# Altium PCB meltdown_protection.PcbDoc
Units mm, origin at the board's own origin, x right, y up, seen from the top; angles counter-clockwise.
Board outline 40.51 x 23.37 mm, 4 copper layers (Top Layer, PWR, GND, Bottom Layer), stack 0.603 mm thick; 49 components, 34 nets, 137 pads, 59 vias.
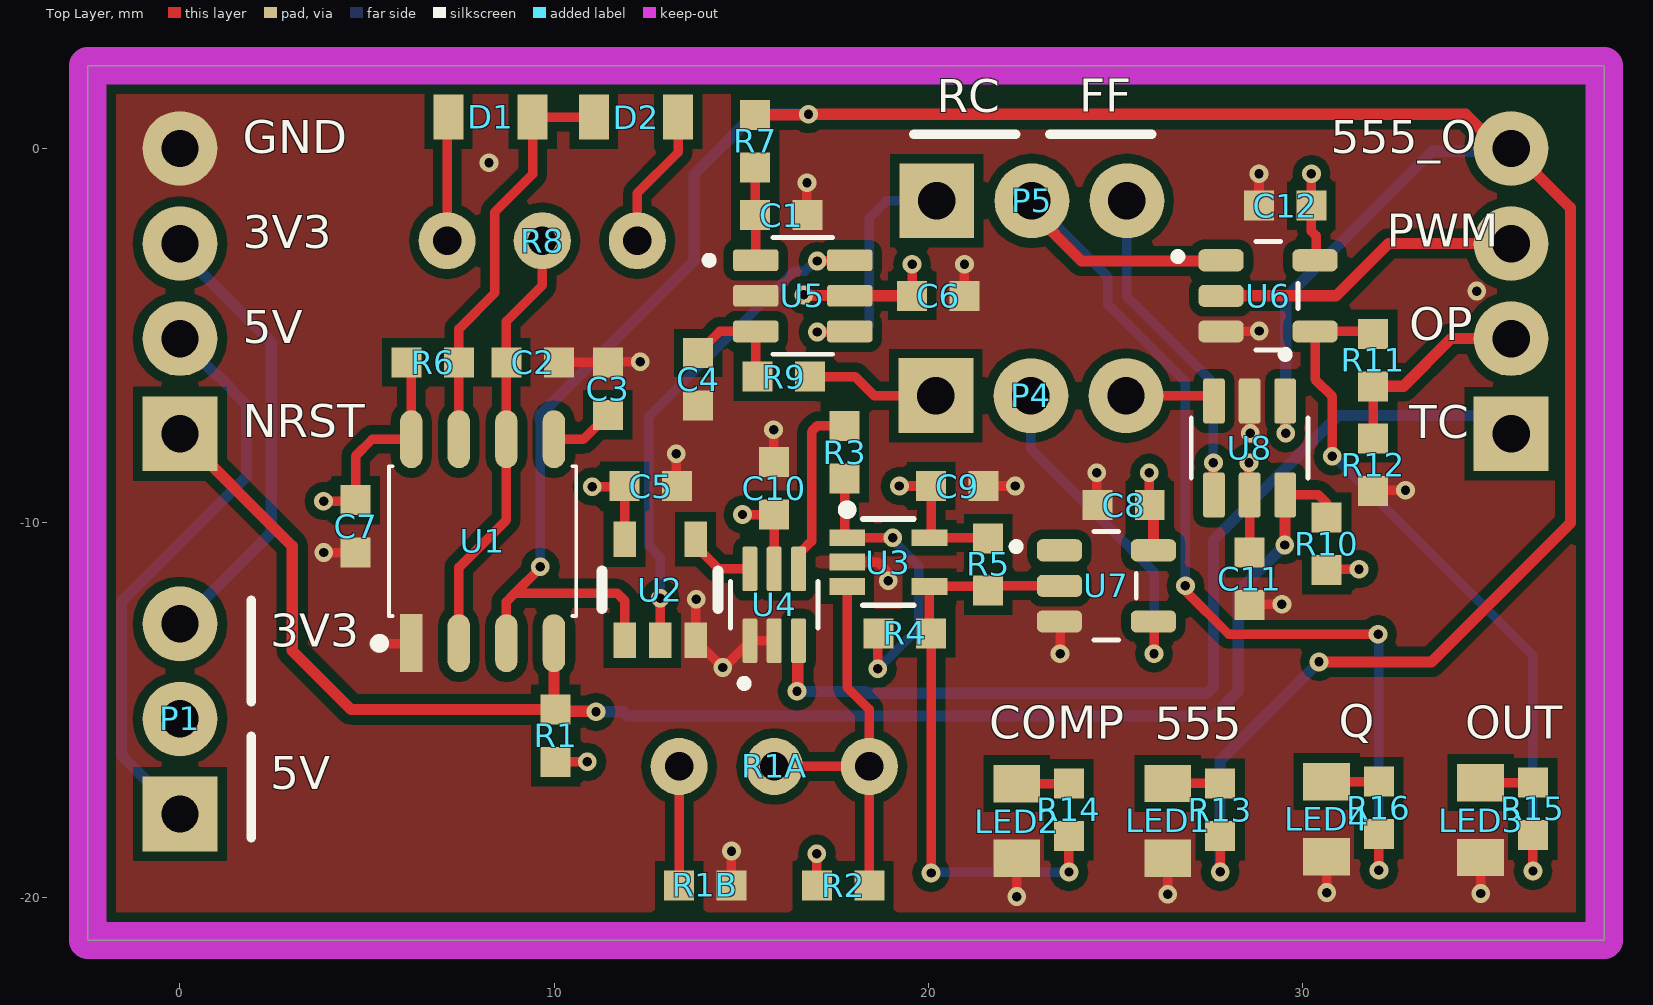
[diagram p0: Top Layer view]
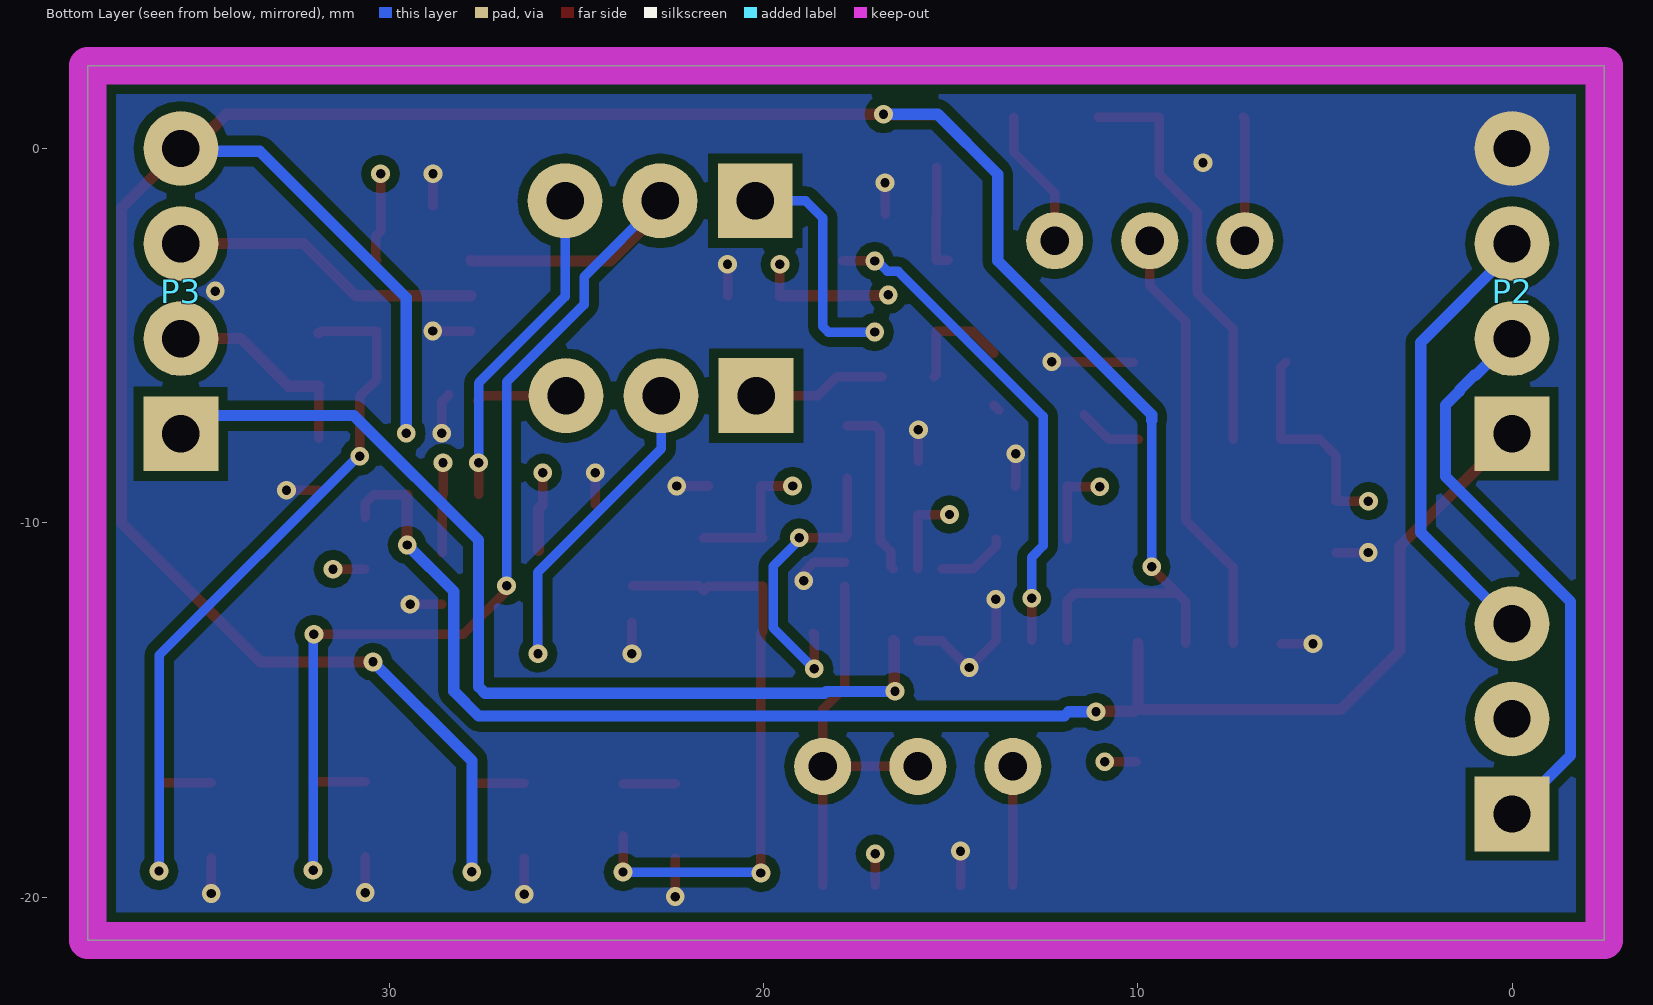
[diagram p1: Bottom Layer view, seen from below]
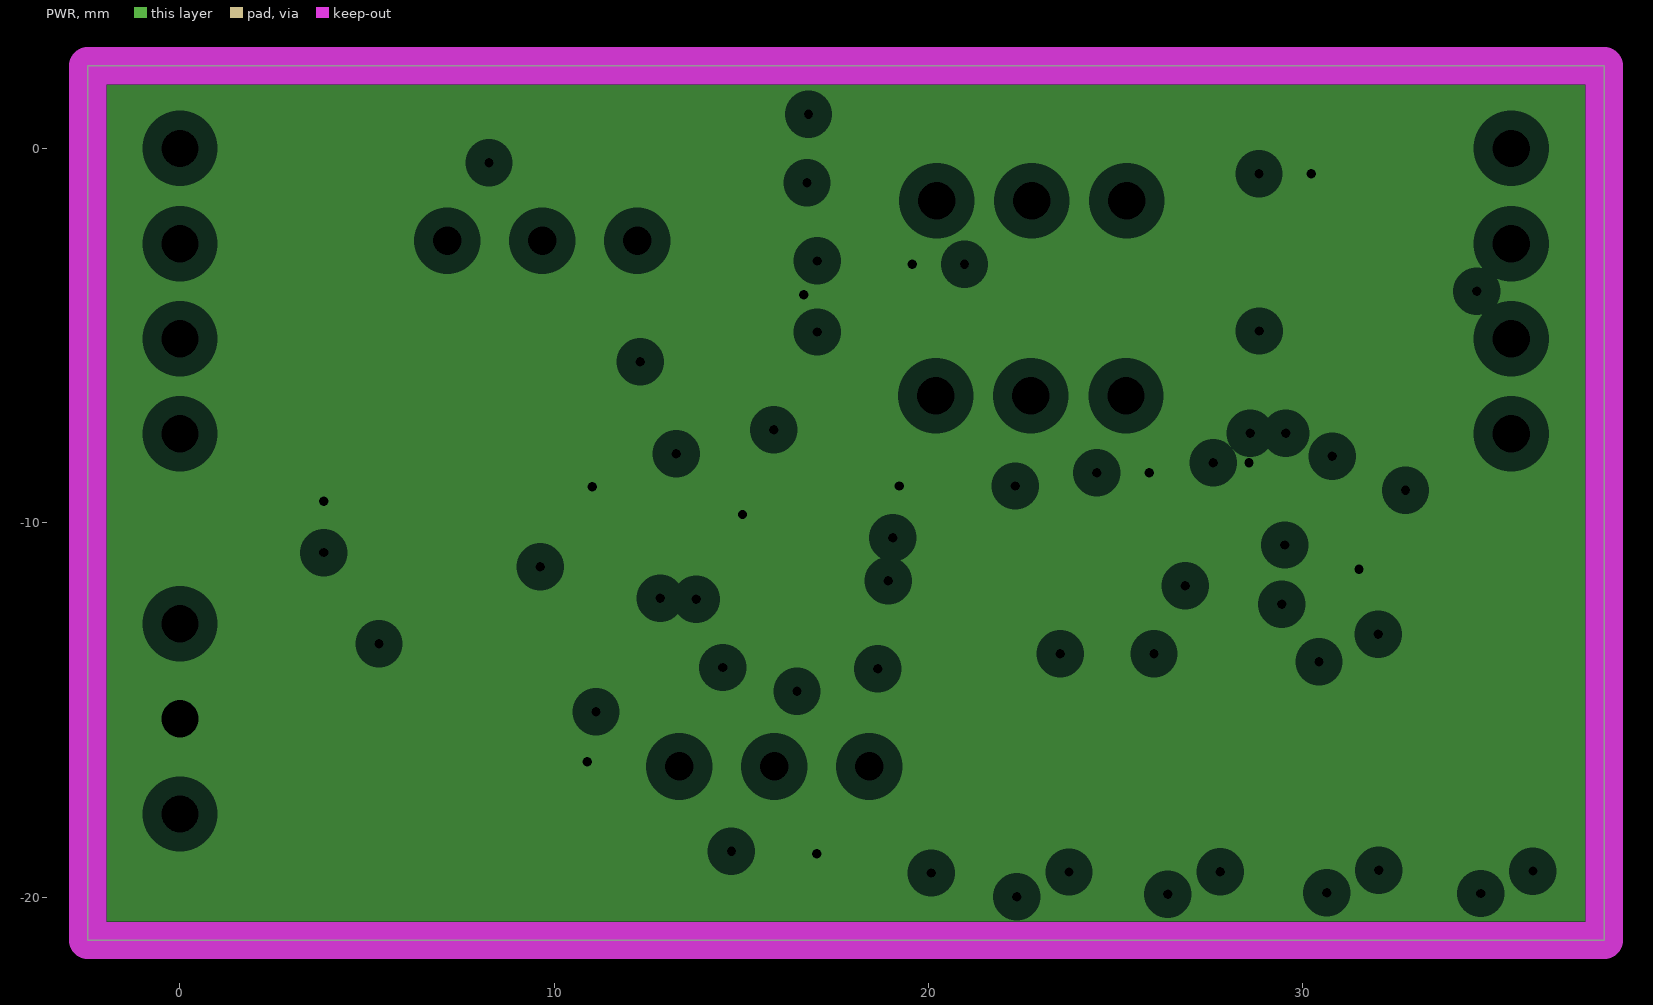
[diagram p2: PWR, clearances drawn from the general rule]
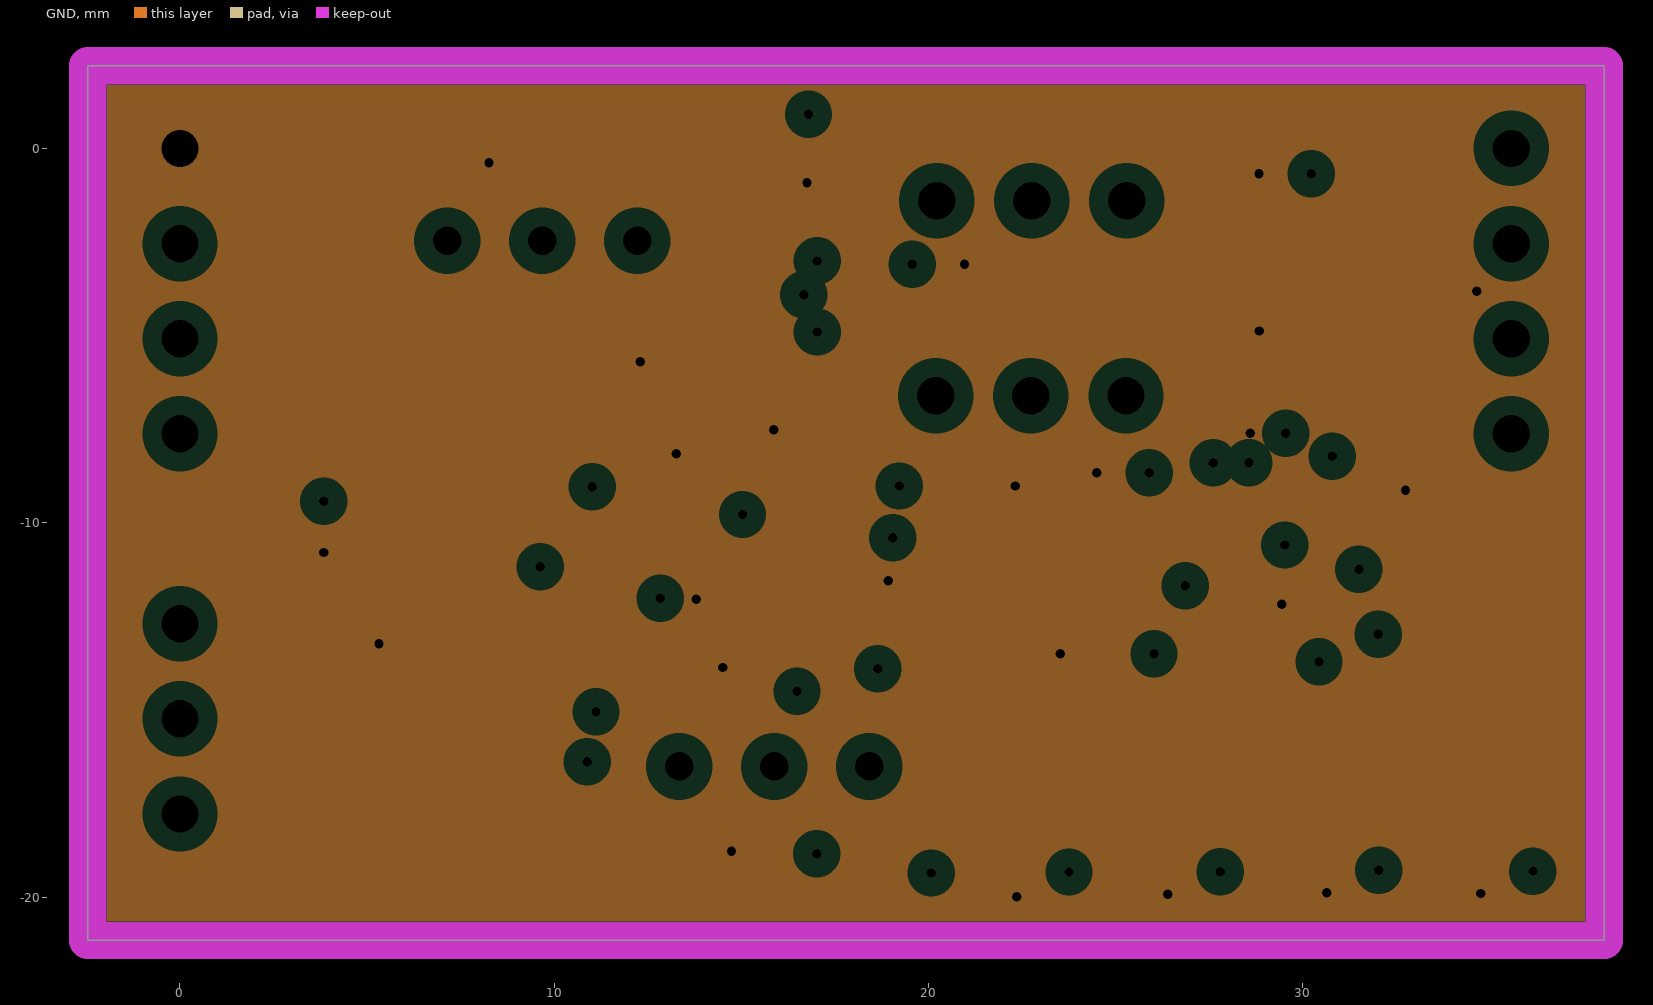
[diagram p3: GND, clearances drawn from the general rule]

## Layer stack, top to bottom
Top Solder: solder mask 0.0102, Solder Resist, Dk 3.5
Top Layer: signal copper 0.0356
Dielectric 2: prepreg 0.0711, PP-006, Dk 4.1
PWR: plane copper 0.035, net VCC
Dielectric 1: dielectric 0.32, FR-4, Dk 4.8
GND: plane copper 0.035, net GND
Dielectric 3: prepreg 0.0711, PP-006, Dk 4.1
Bottom Layer: signal copper 0.0356
Bottom Solder: solder mask 0.0102, Solder Resist, Dk 3.5

## Board outline
-2.464,-21.158 -2.464,2.21 38.049,2.21 38.049,-21.158

## Design rules (kind name [scope] priority, off if disabled: settings)
Clearance Clearance_1 [InComponent('U3') or InComponent('U4')] p1: gap=0.254 ignorepadtopadclearanceinfootprint=FALSE except(0: Arc-Hole Track-Hole SMDPad-Hole THPad-Hole Via-Hole Fill-Hole Poly-Hole Region-Hole Text-Hole; 0.2: SMDPad-SMDPad)
Clearance [All] p2: gap=0.254 ignorepadtopadclearanceinfootprint=FALSE except(0: Arc-Hole Track-Hole SMDPad-Hole THPad-Hole Via-Hole Fill-Hole Poly-Hole Region-Hole Text-Hole)
MinimumSolderMaskSliver [All] p1: minsoldermaskwidth=0.1
PlaneClearance [All] p1: clearance=0.508
PlaneConnect [All] p1: planeconnectstyle=Direct reliefexpansion=0.508 reliefentries=4 reliefconductorwidth=0.254 reliefairgap=0.254
PolygonConnect [All] p1: connectstyle=Direct reliefconductorwidth=0.254 reliefentries=4 polygonreliefangle="90 Angle" airgapwidth=0.254
RoutingVias [All] p1: holewidth=0.25 width=0.5 viastyle="Through Hole" minholewidth=0.25 minwidth=0.5 maxholewidth=0.25 maxwidth=0.5
SilkToSilkClearance [All] p1: silktosilkclearance=0.1
SilkToSolderMaskClearance [IsPad] p1: minsilkscreentomaskgap=0.1 clearancetoexposedcopper=TRUE
SolderMaskExpansion [All] p1: expansion=0.102 istentingtop=FALSE
Width [All] p1: maxlimit=0.6 minlimit=0.2 preferedwidth=0.254
25 further rules are at their usual default settings.

## Components (designator, comment, footprint, x,y, rotation, side; value= is the part's Value field where it differs from the comment)
C1 "0603, capacitor" "0603 cap" 16.067,-1.78 r0 top value=0
C2 "0603, capacitor" "0603 cap" 9.42,-5.717 r0 top value=0
C3 "0603, capacitor" "0603 cap" 11.432,-6.415 r90 top value=0
C4 "0603, capacitor" "0603 cap" 13.841,-6.164 r270 top value=0
C5 "0603, capacitor" "0603 cap" 12.576,-9.019 r0 top value=0
C6 "0603, capacitor" "0603 cap" 20.258,-3.939 r0 top value=0
C7 "0603, capacitor" "0603 cap" 4.688,-10.095 r270 top value=0
C8 "0603, capacitor" "0603 cap" 25.208,-9.523 r180 top value=0
C9 "0603, capacitor" "0603 cap" 20.766,-9.019 r0 top value=0
C10 "0603, capacitor" "0603 cap" 15.877,-9.079 r90 top value=0
C11 "0603, capacitor" "0603 cap" 28.573,-11.495 r270 top value=0
C12 "0603, capacitor" "0603 cap" 29.526,-1.522 r180 top value=0
D1 "Diode, SMD" SOD323 8.298,0.787 r180 top
D2 "Diode, SMD" SOD323 12.185,0.787 r180 top
LED1 "0805, LED" 0805_led 26.415,-17.964 r90 top value="0805 LED"
LED2 "0805, LED" 0805_led 22.377,-17.967 r90 top value="0805 LED"
LED3 "0805, LED" 0805_led 34.772,-17.942 r90 top value="0805 LED"
LED4 "0805, LED" 0805_led 30.657,-17.916 r90 top value="0805 LED"
P1 "1x3 Pin Header Mux" padThree_L 0,-15.24 r90 top value="1x3 Pin Header"
P2 "4x1 Pin Header" padFour_L 0,-3.79 r90 bottom
P3 "4x1 Pin Header" padFour_L 35.56,-3.79 r90 bottom
P4 "1x3 Pin Header Mux" padThree_L 22.733,-6.604 r0 top value="1x3 Pin Header"
P5 "1x3 Pin Header Mux" padThree_L 22.758,-1.397 r0 top value="1x3 Pin Header"
R1 "0603, resistor" 0603 10.033,-15.686 r270 top value=0
R1A "Pot" PV36W104C01B00 15.875,-16.51 r0 top value=0
R1B "0603, resistor" 0603 14.035,-19.685 r180 top value=0
R2 "0603, resistor" 0603 17.715,-19.685 r180 top value=0
R3 "0603, resistor" 0603 17.755,-8.114 r90 top value=0
R4 "0603, resistor" 0603 19.366,-12.954 r180 top value=0
R5 "0603, resistor" 0603 21.59,-11.114 r270 top value=0
R6 "0603, resistor" 0603 6.75,-5.715 r180 top value=0
R7 "0603, resistor" 0603 15.367,0.192 r270 top value=0
R8 "Pot" PV36W104C01B00 9.677,-2.464 r180 top value=0
R9 "0603, resistor" 0603 16.129,-6.096 r180 top value=0
R10 "0603, resistor" 0603 30.632,-10.555 r90 top value=0
R11 "0603, resistor" 0603 31.877,-5.653 r270 top value=0
R12 "0603, resistor" 0603 31.877,-8.447 r90 top value=0
R13 "0603, resistor" 0603 27.788,-17.664 r270 top value=0
R14 "0603, resistor" 0603 23.749,-17.667 r270 top value=0
R15 "0603, resistor" 0603 36.144,-17.642 r270 top value=0
R16 "0603, resistor" 0603 32.029,-17.616 r270 top value=0
U1 "NE555D" SOIC8 8.085,-10.491 r90 top
U2 "SN74LVC1G32DBVT" SOT23-5 12.826,-11.789 r90 top
U3 "MCP6V66UT-E/LTY" SC70P210X110-5N 18.923,-11.049 r0 top
U4 "TS5A3159DCKR" SOT65P210X110-6N 15.875,-12.192 r90 top
U5 "SN74LVC2G17DBVT" SOT95P280X145-6N 16.637,-3.937 r0 top
U6 "SN74LVC1G08DBVR" SOT95P280X145-5N 29.068,-3.937 r0 top
U7 "SN74LVC1G04DBVR" SOT95P280X145-5N 24.75,-11.684 r0 top
U8 "SN74LVC1G175DBVR" SOT95P280X145-6N 28.575,-8.001 r270 top

## Footprints (in the part's own frame and the unit in brackets; to place one, negate y for a bottom-side part, rotate by r counter-clockwise, add the part's x,y. Pads: shape width x height; smd on the part's side, far side on the other; paste and mask are expansions set on the pad)
0603 [mm]
  rect 0.8x0.8 smd mask+0.01: 0(0.7,0) 1(-0.7,0)
  body extent -0.73,-0.41 0.87,0.41, height 0.45
"0603 cap" [mm]
  rect 0.8x0.8 smd mask+0.01: 0(0.7,0.002) 1(-0.7,0.002)
  body extent -0.83,-0.4 0.77,0.4, height 0.6
0805_led [mm]
  rect 1x1.25 smd mask+0.01: 0(-1,0.025) 1(1,0.025)
  body extent -1.03,-0.6 0.99,0.65, height 1.1
padFour_L [mm] "Pad Diameter 2 mm, Hole  0.3 mm, Pitch 2.54 mm"
  rect 2x2 hole 1 mask+0.01: 1(-3.83,0)
  round 2 hole 1 mask+0.01: 2(-1.29,0) 3(1.25,0) 4(3.79,0)
  body extent -5.1,-1.42 5.06,1.5, height 8.51
padThree_L [mm] "Pad Diameter 2 mm, Hole  0.3 mm, Pitch 2.54 mm"
  rect 2x2 hole 1 mask+0.01: 1(-2.54,0)
  round 2 hole 1 mask+0.01: 2(0,0) 3(2.54,0)
  body extent -3.83,-1.38 3.79,1.54, height 8.51
PV36W104C01B00 [mil]
  round 60 hole 30 mask+0.39: 1(-100,0) 2(0,0) 3(100,0)
  body extent -188,-95 188,95, height 455
SC70P210X110-5N [mm] "SC70, 5-Leads, Body 2,03x2,10mm, Pitch 0,65mm, IPC Medium Density"
  rect 0.95x0.45 smd mask+0.01: 1(-1.1,0.65) 2(-1.1,0) 3(-1.1,-0.65) 4(1.1,-0.65) 5(1.1,0.65)
  silkscreen extent -1.22,-1.15 0.67,1.52, body extent -1.3,-1.12 1.3,1.12, height 1.1
SOD323 [mm]
  rect 0.8x1.2 smd mask+0: 1(-1.125,-0.051) 2(1.125,-0.051)
  body extent -1.3,-0.73 1.3,0.62, height 1.1
SOIC8 [mm] "SOIC, 8-Leads, Body 4,90x3,90mm, Pitch 1,27mm, IPC Medium Density"
  rect 1.55x0.6 smd mask+0.01: 1(-2.725,1.905)
  oval 1.55x0.6 smd mask+0.01: 2(-2.725,0.635) 3(-2.725,-0.635) 4(-2.725,-1.905) 5(2.725,-1.905) 6(2.725,-0.635) 7(2.725,0.635) 8(2.725,1.905)
  silkscreen extent -2.85,-2.5 2,2.88, body extent -3.03,-2.43 2.97,2.47, height 1.75
SOT23-5 [mm] "SOT23, 5-Leads, Body 2,90x2,80mm, Pitch 0,95mm, IPC Medium Density"
  rect 0.95x0.6 smd mask+0.01: 1(-1.35,0.95) 2(-1.35,0) 3(-1.35,-0.95) 4(1.35,-0.95) 5(1.35,0.95)
  silkscreen extent -0.5,-1.55 0.5,1.55, body extent -1.25,-1.5 1.25,1.5, height 1.1
SOT65P210X110-6N [mm]
  rrect25% 1.19x0.4 smd mask+0.01: 1(-0.96,0.65) 2(-0.96,0) 3(-0.96,-0.65) 4(0.96,-0.65) 5(0.96,0) 6(0.96,0.65)
  silkscreen extent -2.2,-1.17 0.63,1.17, body extent -1.05,-1 1.05,1, height 1.1
SOT95P280X145-5N [mm]
  rrect50% 1.21x0.59 smd mask+0.01: 1(-1.255,0.95) 2(-1.255,0) 3(-1.255,-0.95) 4(1.255,-0.95) 5(1.255,0.95)
  silkscreen extent -2.51,-1.45 0.8,1.45, body extent -1.4,-1.45 1.4,1.45, height 1.45
SOT95P280X145-6N [mm]
  rrect25% 1.21x0.58 smd mask+0.01: 1(-1.255,0.95) 2(-1.255,0) 3(-1.255,-0.95) 4(1.255,-0.95) 5(1.255,0) 6(1.255,0.95)
  silkscreen extent -2.6,-1.56 0.8,1.56, body extent -1.4,-1.45 1.4,1.45, height 1.45

## Part data
P1 P4 P5: "2.54 mm"
P2 P3: library part "1x4 Pin Header", "2.54 mm"
U1: Package=None, Availability=Unavailable, MP=NE555D, Price=None
U2: "Single 2-input, 1.65-V to 5.5-V OR gate", Package="SOT-23-5 Texas Instruments", Availability="In Stock", Check_prices=https://www.snapeda.com/parts/SN74LVC1G32DBVT/Texas+Instruments/view-part/?ref=eda, MF="Texas Instruments", MP=SN74LVC1G32DBVT, Price=None, Purchase-URL=https://pricing.snapeda.com/search/part/SN74LVC1G32DBVT/?ref=eda, SnapEDA_Link=https://www.snapeda.com/parts/SN74LVC1G32DBVT/Texas+Instruments/view-part/?ref=snap
U3: "Linear High Precision Op Amps-Chopper Stabilized, 1000kHz, 1.8Vto5.5V, SC70-5, RoHS", Manufacturer=Microchip, Category="Amplifiers - Op Amps, Buffer, Instrumentation", Manufacturer Part Number=MCP6V66UT-E/LTY, Pricing 1="3000=0,93150 (USD)", RoHS=No, Stock 1=50, Supplier 1=Avnet, Supplier Part Number 1=MCP6V66UT-E/LTY
U4: "1-?, 5-V, 2:1 (SPDT), 1-channel analog switch 6-SC70 -40 to 85", Package="SOT-SC70-6 Texas Instruments", Availability="In Stock", Check_prices=https://www.snapeda.com/parts/TS5A3159DCKR/Texas%20Instruments/view-part/303403/?ref=eda, MF="Texas Instruments", MP=TS5A3159DCKR, Price=None, Purchase-URL=https://pricing.snapeda.com/search/part/TS5A3159DCKR/?ref=eda, SnapEDA_Link=https://www.snapeda.com/parts/TS5A3159DCKR/Texas%20Instruments/view-part/303403/?ref=snap
U5: "Dual Schmitt-Trigger Buffer", Package="SOT-23-6 Texas Instruments", Availability=Unavailable, DigiKey-Purchase-URL=https://snapeda.com/shop?store=DigiKey&id=466474, MF="Texas Instruments", Mouser-Purchase-URL=https://snapeda.com/shop?store=Mouser&id=466474, MP=SN74LVC2G17DBVT, Price=None, SnapEDA_Link=https://www.snapeda.com/parts/SN74LVC2G17DBVT/Texas%20Instruments/view-part/466474/?ref=snap, Texas_Instruments-Purchase-URL=https://snapeda.com/shop?store=Texas+Instruments&id=466474
U6: "Single 2-Input Positive-AND Gate 5-SOT-23 -40 to 125", Package="SOT-23-5 Texas Instruments", Availability=Unavailable, MF="Texas Instruments", MP=SN74LVC1G08DBVR, Price=None, SnapEDA_Link=https://www.snapeda.com/parts/SN74LVC1G08DBVR/Texas%20Instruments/view-part/78735/?ref=snap, Texas_Instruments-Purchase-URL=https://snapeda.com/shop?store=Texas+Instruments&id=78735
U7: "Single Inverter 5-SOT-23 -40 to 125", Package=None, Availability=Unavailable, MP=SN74LVC1G04DBVR, Price=None
U8: "Single D-Type Flip-Flop with Asynchronous Clear 6-SOT-23 -40 to 125", Package="SOT-23-6 Texas Instruments", Check_prices=https://www.snapeda.com/parts/SN74LVC1G175DBVR/Texas%20Instruments/view-part/473666/?ref=eda, Digi-Key_Part_Number=296-17617-1-ND, MF="Texas Instruments", MP=SN74LVC1G175DBVR, Purchase-URL=https://pricing.snapeda.com/search/part/SN74LVC1G175DBVR/?ref=eda, SnapEDA_Link=https://www.snapeda.com/parts/SN74LVC1G175DBVR/Texas%20Instruments/view-part/473666/?ref=snap

## Via types
v1: diameter 0.5, hole 0.25, Top Layer to Bottom Layer, 59 vias

## Nets (pads, with @x,y where several pads share a name; then routed paths per layer and width w, separated by ;. In a path a pad name is that pad's centre, name@x,y a point inside that pad or via, vN(x,y) a via of type N, cw(c..) or ccw(c..) an arc to the next point about the centre after c; other vN are vias at no path point)
3V3: P1.3 P2.3 | length 12.2
  Bottom Layer w0.3: P1.3 2.438,-10.262 2.438,-5.182 0,-2.743 P2.3
5V: P1.1 P2.2 | length 15.5
  Bottom Layer w0.3: P1.1 -1.56,-16.22 -1.56,-12.101 1.778,-8.763 1.778,-6.858 1.404,-6.484 1.404,-6.453 1.011,-6.06 0.98,-6.06 P2.2
555_OUT: P3.4 R7.1 R13.0 U1.3 U2.1 U8.1 | length 81.6
  Top Layer w0.254: U1.3 8.72,-12.108 8.941,-11.887 ; v1(9.627,-11.176) 9.627,-11.201 8.941,-11.887 ; U2.1 11.876,-12.079 11.684,-11.887 8.941,-11.887 ; v1(27.788,-19.326) R13.0 ; v1(29.541,-7.609) 29.533,-7.6 29.533,-6.772 U8.1@29.542,-6.763
  Top Layer w0.3: R7.1 15.378,0.903 16.778,0.903 v1(16.789,0.914) 34.347,0.914 35.262,0 P3.4 37.145,-1.585 37.145,-10.008 33.437,-13.716 v1(30.429,-13.716)
  Bottom Layer w0.254: v1(9.627,-11.176) 9.627,-7.264
  Bottom Layer w0.3: 9.627,-7.264 9.627,-7.112 13.741,-2.997 13.741,-0.686 15.342,0.914 v1(16.789,0.914) ; v1(27.788,-19.326) 27.788,-16.358 v1(30.429,-13.716) ; v1(29.541,-7.609) 29.542,-7.608 29.542,-3.986 33.452,-0.076 P3.4@35.484,-0.076
AND_IN: P5.2 R16.0 U6.1 | length 30.7
  Top Layer w0.254: v1(26.86,-11.684) 26.86,-11.819 28.017,-12.976 v1(32.007,-12.976) ; v1(32.029,-19.279) R16.0
  Top Layer w0.3: P5.2@22.733,-1.651 24.087,-3.005 27.795,-3.005 U6.1
  Bottom Layer w0.254: P5.2 24.79,-3.429 24.79,-4.168 26.86,-6.238 v1(26.86,-11.684) ; v1(32.007,-12.976) 32.029,-12.998 v1(32.029,-19.279)
COMP_OUT: R4.1 R5.0 R14.0 U3.4 U7.2 | length 15.9
  Top Layer w0.254: v1(20.066,-19.355) R4.1 20.023,-12.911 U3.4 21.475,-11.699 R5.0 21.72,-11.684 U7.2 ; v1(23.749,-19.329) R14.0
  Bottom Layer w0.254: v1(20.066,-19.355) 20.079,-19.342 23.736,-19.342 v1(23.749,-19.329) v1@23.718,-19.298
GND: C1.0 C2.0 C3.0 C4.0 C5.0 C6.0 C7.0 C8.0 C9.0 C10.0 C11.0 C12.0 LED1.0 LED2.0 LED3.0 LED4.0 P2.4 R1B.1 R12.1 U1.1 U2.3 U3.2 U4.1 U4.2 U5.2 U6.3 U7.3 U8.2 | length 24.7
  Top Layer w0.254: v1(3.844,-10.795) C7.0 ; v1(5.316,-13.234) U1.1@6.163,-13.234 ; C2.0 C3.0 ; C3.0@11.447,-5.698 v1(12.294,-5.698) ; v1(13.259,-8.153) 13.259,-9 C5.0 ; C4.0@13.716,-6.991 C4.0 ; v1(13.792,-12.04) 13.784,-12.048 13.784,-13.131 U2.3 v1(14.501,-13.864) 14.53,-13.864 U4.1@15.225,-13.169 ; v1(14.732,-18.771) 14.732,-19.682 R1B.1 ; U4.1 U4.2 ; C10.0@15.858,-8.362 v1(15.858,-7.515) ; C1.0@16.75,-1.761 v1(16.75,-0.914) ; U3.2 18.644,-11.049 18.923,-11.328 v1(18.923,-11.549) ; C6.0 v1(20.958,-3.091) ; C9.0 v1(22.312,-9.017) ; v1(22.352,-19.986) LED2.0 ; v1(23.512,-13.498) U7.3@23.512,-12.651 ; C8.0@24.491,-9.508 v1(24.491,-8.661) ; v1(26.391,-19.926) LED1.0 ; U6.3 27.818,-4.882 28.824,-4.882 v1(28.829,-4.877) ; U8.2@28.412,-6.583 U8.2 ; C11.0@28.592,-12.178 v1(29.439,-12.178) ; v1(28.592,-7.61) U8.2@28.592,-6.763 ; C12.0 v1(28.826,-0.678) ; v1(30.632,-19.879) LED4.0 ; R12.1@31.894,-9.13 v1(32.741,-9.13) ; v1(34.747,-19.904) LED3.0
  other v1: 34.646,-3.81 8.255,-0.381
INV_OUT: P4.2 U7.4 | length 9.1
  Top Layer w0.254: v1(26.022,-13.498) U7.4@26.022,-12.651
  Bottom Layer w0.254: P4.2 22.733,-8.026 26.022,-11.316 v1(26.022,-13.498)
MUX_OUT: R3.0 U4.4 | length 4.8
  Top Layer w0.254: U4.4 16.598,-11.159 16.598,-10.764 16.872,-10.49 16.872,-7.563 17.021,-7.414 R3.0
NetC1_1: C1.1 R7.0 U5.1 | length 2.8
  Top Layer w0.254: U5.1@15.067,-2.987 U5.1 15.382,-1.793 C1.1 R7.0
NetC2_1: C2.1 R8.2 U1.2 U1.6 | length 11.7
  Top Layer w0.254: U1.2 7.45,-11.194 8.72,-9.924 U1.6 C2.1 8.72,-4.615 9.677,-3.658 R8.2
NetC3_1: C3.1 U1.5 | length 1.7
  Top Layer w0.254: U1.5 10.779,-7.766 C3.1
NetC4_1: C4.1 R9.0 U5.3 | length 3
  Top Layer w0.254: C4.1 14.42,-4.887 U5.3 15.382,-6.049 R9.0
NetD1_1: D1.1 D2.2 R6.1 U1.7 | length 11.1
  Top Layer w0.254: U1.7 R6.1 7.45,-4.818 8.407,-3.861 8.407,-1.702 9.423,-0.686 D1.1 D2.2
NetD1_2: D1.2 R8.3 | length 3.3
  Top Layer w0.254: R8.3 7.137,0.802 D1.2
NetD2_1: D2.1 R8.1 | length 3.8
  Top Layer w0.254: R8.1 12.217,-1.194 13.31,-0.102 D2.1
NetLED1_1: LED1.1 R13.1 | length 1.4
  Top Layer w0.254: LED1.1 R13.1
NetLED2_1: LED2.1 R14.1 | length 1.4
  Top Layer w0.254: LED2.1 R14.1
NetLED3_1: LED3.1 R15.1 | length 1.4
  Top Layer w0.254: LED3.1 R15.1
NetLED4_1: LED4.1 R16.1 | length 1.4
  Top Layer w0.254: LED4.1 R16.1
NetP4_1: P4.1 R9.1 | length 3.6
  Top Layer w0.254: R9.1 18.034,-6.096 18.542,-6.604 P4.1
NetP4_3: P4.3 U8.3 | length 2.4
  Top Layer w0.254: P4.3 27.483,-6.604 U8.3
NetR1A_1: R1A.1 R1B.0 | length 3.2
  Top Layer w0.254: R1B.0 R1A.1
NetR1A_2: R1A.2 R1A.3 R2.1 U3.3 | length 10.8
  Top Layer w0.254: R1A.2 R1A.3 ; U3.3 17.823,-14.394 18.415,-14.986 R1A.3 ; R2.1 R1A.3
NetR3_1: R3.1 R4.0 U3.1 | length 7.9
  Top Layer w0.254: U3.1@17.755,-10.331 R3.1 ; U3.1 v1(19.044,-10.399) ; v1(18.644,-13.899) 18.644,-12.976 R4.0
  Bottom Layer w0.254: v1(18.644,-13.899) 19.736,-12.807 19.736,-11.157 19.044,-10.466 v1(19.044,-10.399)
NetR11_1: R11.1 R15.0 U6.4 | length 19.4
  Top Layer w0.254: v1(30.785,-8.224) 30.785,-6.629 30.323,-6.168 U6.4 31.811,-4.887 R11.1 R11.1@31.902,-4.928 ; v1(36.144,-19.304) R15.0
  Bottom Layer w0.254: v1(30.785,-8.224) 30.83,-8.224 36.144,-13.538 v1(36.144,-19.304)
NetU2_2: U2.2 U5.6 | length 13.2
  Top Layer w0.254: U2.2 v1(12.827,-12.014) ; v1(17.028,-3.004) U5.6@17.875,-3.004
  Bottom Layer w0.254: v1(12.827,-12.014) v1(12.827,-12.014) 12.826,-10.914 12.522,-10.611 12.522,-7.159 16.401,-3.281 16.685,-3.281 16.962,-3.004 v1(17.028,-3.004)
OR_OUT: U2.4 U4.6 | length 1.9
  Top Layer w0.254: U2.4 13.776,-10.614 14.394,-11.232 U4.6
OUTPUT: P3.2 R11.0 R12.0 | length 5.6
  Top Layer w0.254: R12.0 R11.0
  Top Layer w0.3: R11.0 32.687,-6.353 33.96,-5.08 P3.2
Q_OUT: P5.3 U8.4 | length 8.8
  Top Layer w0.254: U8.4@27.608,-9.239 v1(27.608,-8.392)
  Bottom Layer w0.254: P5.3 25.298,-3.958 27.608,-6.267 v1(27.608,-8.392)
R\S\T\: P2.1 R1.1 R10.0 U1.4 U8.6 | length 42.4
  Top Layer w0.254: U8.6 30.414,-9.256 30.632,-9.474 R10.0
  Top Layer w0.3: P2.1 2.997,-10.617 2.997,-13.411 4.572,-14.986 R1.1 ; U1.4 9.99,-14.943 R1.1 ; v1(11.112,-15.05) 11.1,-15.037 10.084,-15.037 R1.1 ; v1(29.515,-10.592) 29.52,-10.587 29.52,-9.261 U8.6
  Bottom Layer w0.3: v1(11.112,-15.05) 11.849,-15.05 11.963,-15.164 27.607,-15.164 28.27,-14.501 28.27,-11.836 v1(29.515,-10.592)
SCH_OUT: P5.1 U5.4 | length 7.2
  Top Layer w0.254: v1(17.028,-4.904) U5.4@17.875,-4.904
  Bottom Layer w0.254: v1(17.028,-4.904) 18.266,-4.904 18.415,-4.755 18.415,-1.854 18.872,-1.397 P5.1
STM_PWM: P3.3 U6.2 | length 8.3
  Top Layer w0.3: U6.2 30.886,-3.937 32.283,-2.54 P3.3
TEMP_VOLTAGE: P3.1 U4.3 | length 26
  Top Layer w0.3: v1(16.485,-14.503) 16.505,-14.483 16.505,-13.172 U4.3
  Bottom Layer w0.3: v1(16.485,-14.503) 18.323,-14.503 18.373,-14.553 27.434,-14.553 27.61,-14.378 27.61,-10.465 30.943,-7.132 35.072,-7.132 P3.1
VCC: C5.1 C6.1 C7.1 C8.1 C9.1 C10.1 C11.1 C12.1 P1.2 R1.0 R2.0 R5.1 R6.0 R10.1 U1.8 U2.5 U3.5 U4.5 U5.5 U6.5 U7.5 U8.5 | length 27.4
  Top Layer w0.254: v1(3.836,-9.422) C7.1@4.683,-9.422 ; C7.1@4.71,-9.414 C7.1 4.69,-8.213 5.137,-7.766 U1.8 6.18,-5.845 R6.0 ; R1.0 v1(10.879,-16.386) ; v1(11.012,-9.034) C5.1@11.859,-9.034 ; U2.5 C5.1 ; v1(15.029,-9.779) C10.1 U4.5 ; R2.0 v1(17.015,-18.839) ; v1(19.22,-9.017) C9.1 20.066,-10.356 U3.5 21.575,-10.399 R5.1 ; C6.1 v1(19.558,-3.091) ; C8.1@25.891,-9.508 v1(25.891,-8.661) ; U8.5@28.558,-9.239 v1(28.558,-8.392) ; C11.1 U8.5 ; v1(30.226,-0.678) C12.1 30.226,-2.21 30.353,-2.337 30.353,-2.957 U6.5 ; R10.1@30.65,-11.238 v1(31.496,-11.238)
  Top Layer w0.3: v1(16.662,-3.912) 16.675,-3.924 17.879,-3.924 U5.5 C6.1 ; C8.1 26.005,-9.622 U7.5
pads on no net: U7.1

## Polygon pours and split planes (outlines as drawn)
GND on Bottom Layer "BOTTOM" (solid, pour order 1): -2.464,-21.158 -2.464,2.21 38.049,2.21 38.049,-21.158
GND on Top Layer "TOP" (solid, remove dead copper, pour order 0): -2.464,-21.158 -2.464,2.21 38.049,2.21 38.049,-21.158
VCC on PWR (split plane): 37.539,-20.648 -1.953,-20.648 -1.953,1.699 37.539,1.699
GND on GND (split plane): 37.539,-20.648 -1.953,-20.648 -1.953,1.699 37.539,1.699

## Keep-outs
Keep-Out Layer:
  the board outline again, w1

## Silkscreen, mask and mechanical layers (free items; w line width, h text height)
Top Overlay:
  lines w0.254: 1.905,-18.415 1.905,-15.697 ; 1.905,-14.783 1.905,-12.065 ; 19.609,0.381 22.327,0.381 ; 23.241,0.381 25.959,0.381
  text "FF" at 24.028,0.682 h1.52
  text "RC" at 20.218,0.67 h1.52
  text "GND" at 1.676,-0.415 h1.52
  text "555_O" at 30.74,-0.417 h1.52
  text "PWM" at 32.233,-2.921 h1.52
  text "3V3" at 1.676,-2.955 h1.52
  text "OP" at 32.842,-5.419 h1.52
  text "5V" at 1.676,-5.495 h1.52
  text "NRST" at 1.676,-8.015 h1.52
  text "TC" at 32.842,-8.03 h1.52
  text "3V3" at 2.413,-13.603 h1.52
  text "Q" at 30.963,-16.028 h1.52
  text "COMP" at 21.615,-16.067 h1.52
  text "OUT" at 34.341,-16.067 h1.52
  text "555" at 26.035,-16.092 h1.52
  text "5V" at 2.413,-17.413 h1.52